# Altium PCB IPM.PcbDoc
Units mm, origin at the board's own origin, x right, y up, seen from the top; angles counter-clockwise.
Board outline 41.15 x 42.67 mm, 2 copper layers (Top Layer, Bottom Layer); 3 components, 24 nets, 48 pads, 0 vias.
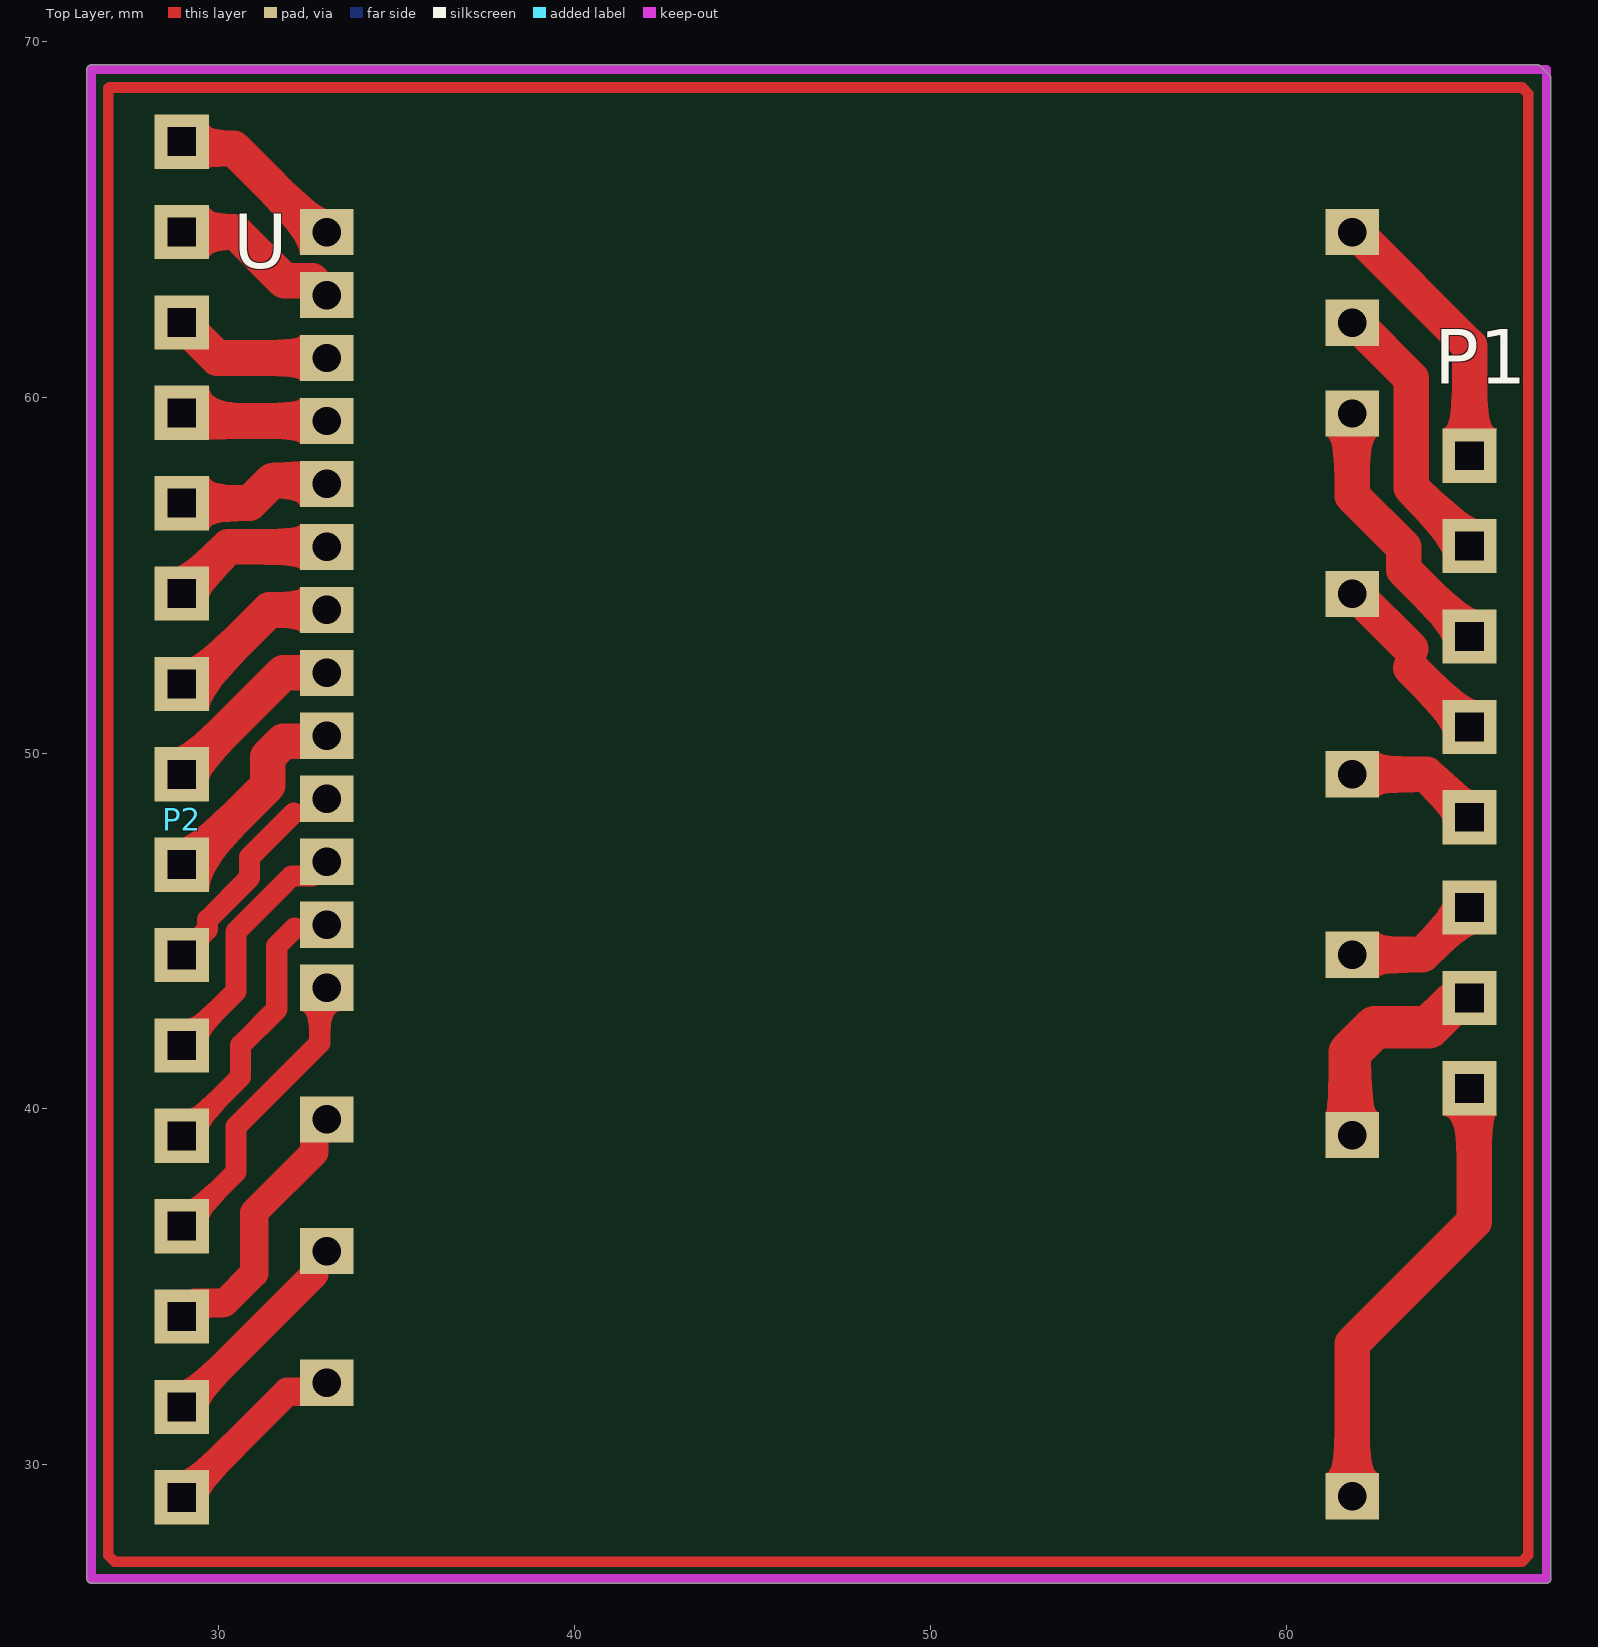
[diagram p0: Top Layer view]
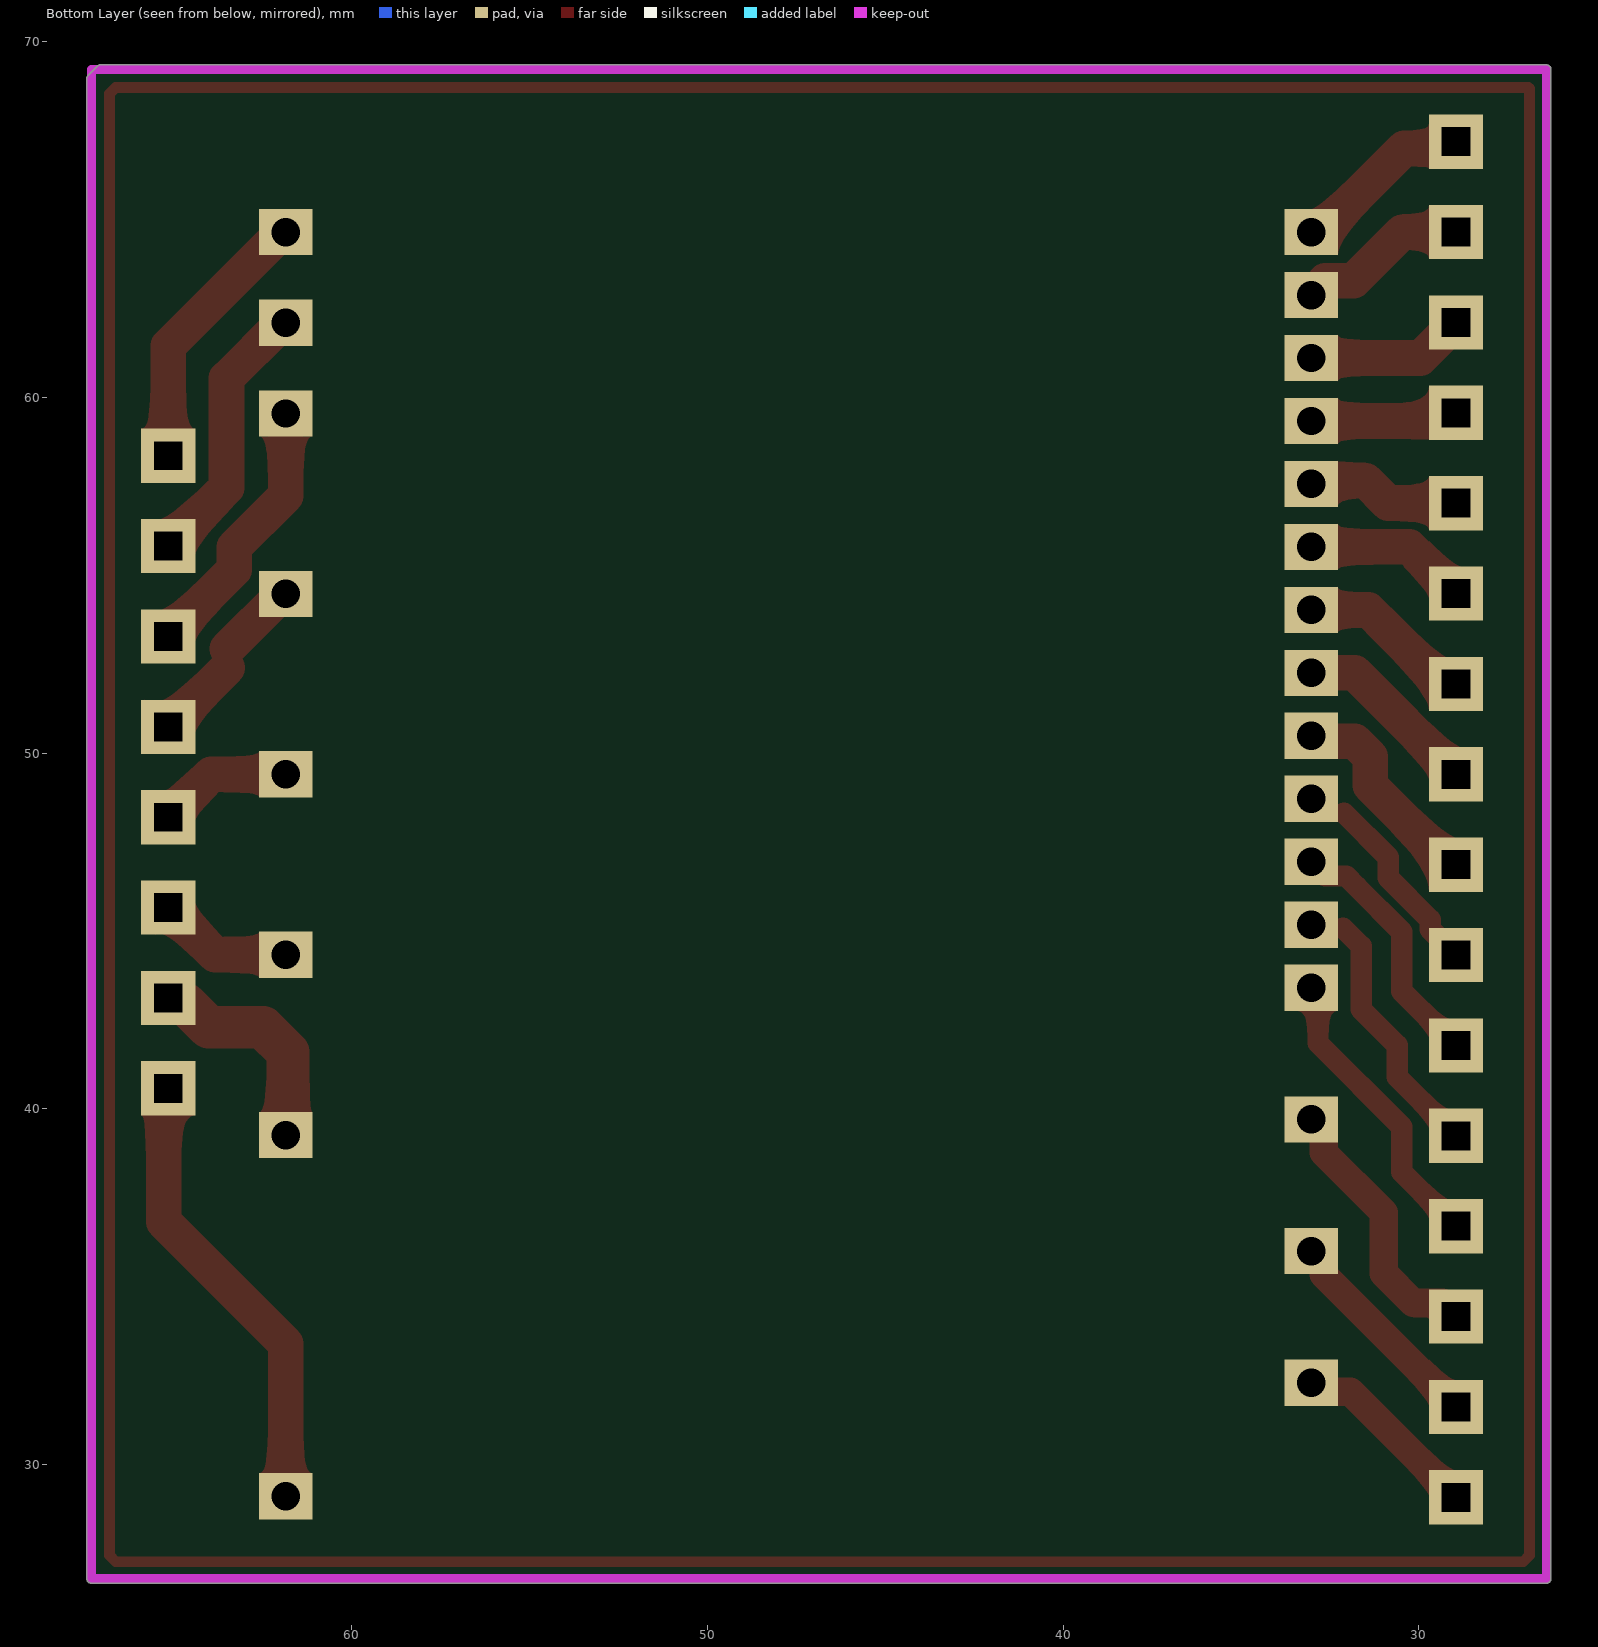
[diagram p1: Bottom Layer view, seen from below]

## Layer stack, top to bottom
Top Solder: solder mask 0.0102, Solder Resist, Dk 3.5
Top Layer: signal copper 0.0356
Dielectric 1: dielectric 0.32, FR-4, Dk 4.8
Bottom Layer: signal copper 0.0356
Bottom Solder: solder mask 0.0102, Solder Resist, Dk 3.5

## Board outline
26.416,26.67 cw(c26.416,26.797) 26.289,26.797 26.289,69.215 cw(c26.416,69.215) 26.416,69.342 67.056,69.342 cw(c67.056,69.215) 67.147,69.305 67.146,69.305 67.4,69.051 67.4,69.052 cw(c67.31,68.961) 67.437,68.961 67.437,26.797 cw(c67.31,26.797) 67.31,26.67 66.294,26.67

## Design rules (kind name [scope] priority, off if disabled: settings)
Clearance [All] p1: gap=0.2 ignorepadtopadclearanceinfootprint=FALSE except(0: Arc-Hole Track-Hole SMDPad-Hole THPad-Hole Via-Hole Fill-Hole Poly-Hole Region-Hole Text-Hole)
PolygonConnect [All] p1: connectstyle=Relief reliefconductorwidth=0.254 reliefentries=4 polygonreliefangle="90 Angle" airgapwidth=0.254
RoutingVias [All] p1: holewidth=0.3 width=0.6 viastyle="Through Hole" minholewidth=0.25 minwidth=0.2 maxholewidth=2.5 maxwidth=5
SolderMaskExpansion [All] p1: expansion=0.102 istentingtop=FALSE
Width [All] p1: maxlimit=10 minlimit=0.1 preferedwidth=0.3 minimp=50.000000 maximp=50.000000 favimp=50.000000
30 further rules are at their usual default settings.

## Components (designator, comment, footprint, x,y, rotation, side; value= is the part's Value field where it differs from the comment)
P1 "8xPinHeader" 8XPINHEADER 65.15,40.576 r90 top
P2 "8xPinHeader2" 8XPINHEADER2 28.956,67.183 r270 top
U "6MBP15XSF060-50" 6MBP15XSF060-50 61.849,29.113 r90 top

## Footprints (in the part's own frame and the unit in brackets; to place one, negate y for a bottom-side part, rotate by r counter-clockwise, add the part's x,y. Pads: shape width x height; smd on the part's side, far side on the other; paste and mask are expansions set on the pad)
6MBP15XSF060-50 [mm] "600V 15A"
  rect 1.3x1.5 hole 0.8: 3(0,0) 5(10.15,0) 7(15.22,0) 9(20.29,0) 10(25.36,0) 11(30.43,0) 12(32.98,0) 13(35.53,0) 14(35.53,28.82) 15(33.76,28.82) 16(31.99,28.82) 17(30.22,28.82) 18(28.45,28.82) 19(26.68,28.82) 20(24.91,28.82) 21(23.14,28.82) 22(21.37,28.82) 23(19.6,28.82) 24(17.83,28.82) 26(16.06,28.82) 28(14.29,28.82) 30(10.59,28.82) 32(6.89,28.82) 36(3.19,28.82)
8XPINHEADER [mil]
  rect 60x60 hole 31.5 square: 3(0,0) 5(100,0) 7(200,0) 9(300,0) 10(400,0) 11(500,0) 12(600,0) 13(700,0)
  body extent -50,-49 750,49, height 336
8XPINHEADER2 [mil]
  rect 60x60 hole 31.5 square: 14(0,0) 15(100,0) 16(200,0) 17(300,0) 18(400,0) 19(500,0) 20(600,0) 21(700,0) 22(800,0) 23(900,0) 24(1000,0) 26(1100,0) 28(1200,0) 30(1300,0) 32(1400,0) 36(1500,0)
  body extent -45,-53 1545,40, height 419

## Part data
U: "600v 15a"

## Nets (pads, with @x,y where several pads share a name; then routed paths per layer and width w, separated by ;. In a path a pad name is that pad's centre, name@x,y a point inside that pad or via, vN(x,y) a via of type N, cw(c..) or ccw(c..) an arc to the next point about the centre after c; other vN are vias at no path point)
NetP1_3: P1.3 U.3 | length 12.9
  Top Layer w1: U.3 61.849,33.401 65.278,36.83 65.278,40.448 P1.3
NetP1_5: P1.5 U.5 | length 6.4
  Top Layer w1.2: U.5 61.836,39.263 61.786,39.313 61.786,41.588 62.489,42.291 64.008,42.291 64.671,42.954 64.988,42.954 P1.5
NetP1_7: P1.7 U.7 | length 3.8
  Top Layer w1: U.7 63.827,44.333 P1.7
NetP1_9: P1.9 U.9 | length 3.8
  Top Layer w1: U.9 63.943,49.403 P1.9
NetP1_10: P1.10 U.10 | length 5.2
  Top Layer w0.5: U.10 U.10@61.949,54.473 ; 63.494,52.392 63.494,52.928
  Top Layer w1: U.10@61.949,54.473 63.494,52.928 ; 63.494,52.392 P1.10
NetP1_11: P1.11 U.11 | length 7.6
  Top Layer w1: U.11 61.849,57.232 63.299,55.782 63.299,55.153 64.888,53.564 64.888,53.538 P1.11
NetP1_12: P1.12 U.12 | length 7.7
  Top Layer w0.6: U.12 U.12@61.949,62.093 ; P1.12@64.688,56.278 P1.12
  Top Layer w1: U.12@61.949,62.093 63.513,60.529 63.513,57.453 P1.12@64.688,56.278
NetP1_13: P1.13 U.13 | length 7.7
  Top Layer w0.6: U.13 U.13@61.949,64.643
  Top Layer w1: U.13@61.949,64.643 65.15,61.442 P1.13
NetP2_14: P2.14 U.14 | length 5.1
  Top Layer w1: P2.14 29.144,66.995 30.414,66.995 32.616,64.793 32.879,64.793 U.14
NetP2_15: P2.15 U.15 | length 4.8
  Top Layer w0.5: U.15@32.629,63.273 U.15
  Top Layer w1: P2.15 30.468,64.643 31.838,63.273 U.15@32.629,63.273
NetP2_16: P2.16 U.16 | length 4.5
  Top Layer w1: P2.16 29.956,61.103 U.16
NetP2_17: P2.17 U.17 | length 4.2
  Top Layer w0.5: P2.17 P2.17@29.186,59.333
  Top Layer w1: P2.17@29.186,59.333 U.17
NetP2_18: P2.18 U.18 | length 4.4
  Top Layer w0.5: U.18@32.934,57.658 U.18
  Top Layer w1: P2.18 30.861,57.023 31.496,57.658 U.18@32.934,57.658
NetP2_19: P2.19 U.19 | length 4.6
  Top Layer w1: P2.19 30.266,55.793 U.19
NetP2_20: P2.20 U.20 | length 5.1
  Top Layer w0.5: 30.861,53.467 30.988,53.467
  Top Layer w1: P2.20 29.218,52.205 29.599,52.205 30.861,53.467 31.417,54.023 31.544,54.023 U.20
NetP2_21: P2.21 U.21 | length 5.3
  Top Layer w1: P2.21 31.806,52.253 U.21
NetP2_22: P2.22 U.22 | length 6.1
  Top Layer w0.5: P2.22 29.468,47.375 P2.22@29.655,47.375 ; U.22@32.929,50.483 U.22
  Top Layer w1: P2.22@29.655,47.375 31.369,49.089 31.369,49.897 31.805,50.333 32.879,50.333 U.22
NetP2_23: P2.23 U.23 | length 6.4
  Top Layer w0.5: 32.102,48.313 32.629,48.313 U.23
  Top Layer w0.6: P2.23 29.68,45.047 29.68,45.311 30.861,46.492 30.861,47.072 32.102,48.313
NetP2_24: P2.24 U.24 | length 7.2
  Top Layer w0.5: U.24@32.629,46.543 U.24
  Top Layer w0.6: P2.24 30.48,43.307 30.48,44.98 31.75,46.25 32.043,46.543 U.24@32.629,46.543
NetP2_26: P2.26 U.26 | length 8.1
  Top Layer w0.5: 32.131,45.085 32.941,45.085 U.26
  Top Layer w0.6: P2.26 30.607,40.894 30.607,41.783 31.623,42.799 31.623,44.577 32.131,45.085
NetP2_28: P2.28 U.28 | length 8.4
  Top Layer w0.6: P2.28 30.48,38.227 30.48,39.497 32.836,41.853 32.836,43.21 U.28
NetP2_30: P2.30 U.30 | length 7.8
  Top Layer w0.5: P2.30 P2.30@29.337,34.544
  Top Layer w0.8: P2.30@29.337,34.544 30.156,34.544 30.988,35.376 30.988,37.084 32.679,38.775 32.679,39.453 32.929,39.703 U.30
NetP2_32: P2.32 U.32 | length 6.1
  Top Layer w0.8: P2.32 32.679,35.346 32.679,35.753 32.929,36.003 U.32
NetP2_36: P2.36 U.36 | length 5.4
  Top Layer w0.8: P2.36 31.926,32.053 32.779,32.053 U.36
copper on no net: | length 162.4
  Top Layer w0.3: 26.893,68.676 26.924,68.707 ; 26.893,68.676 26.893,68.254 26.893,67.564 26.893,28.575 26.893,27.45 27.069,27.274 66.626,27.274 66.802,27.45 66.802,68.531 66.626,68.707 27.147,68.707 26.924,68.707 ; 26.893,68.676 26.924,68.707

## Keep-outs
Keep-Out Layer:
  lines w0.254: 26.416,26.797 26.416,69.215 ; 26.416,26.797 66.294,26.797 67.31,26.797 67.31,69.215 26.416,69.215 ; 26.416,26.797 26.416,69.215